# Altium PCB ControlPWMSin.PcbDoc
Units mm, origin at the board's own origin, x right, y up, seen from the top; angles counter-clockwise.
Board outline 100 x 90 mm, 2 copper layers (Top Layer, Bottom Layer); 43 components, 27 nets, 155 pads, 20 vias.
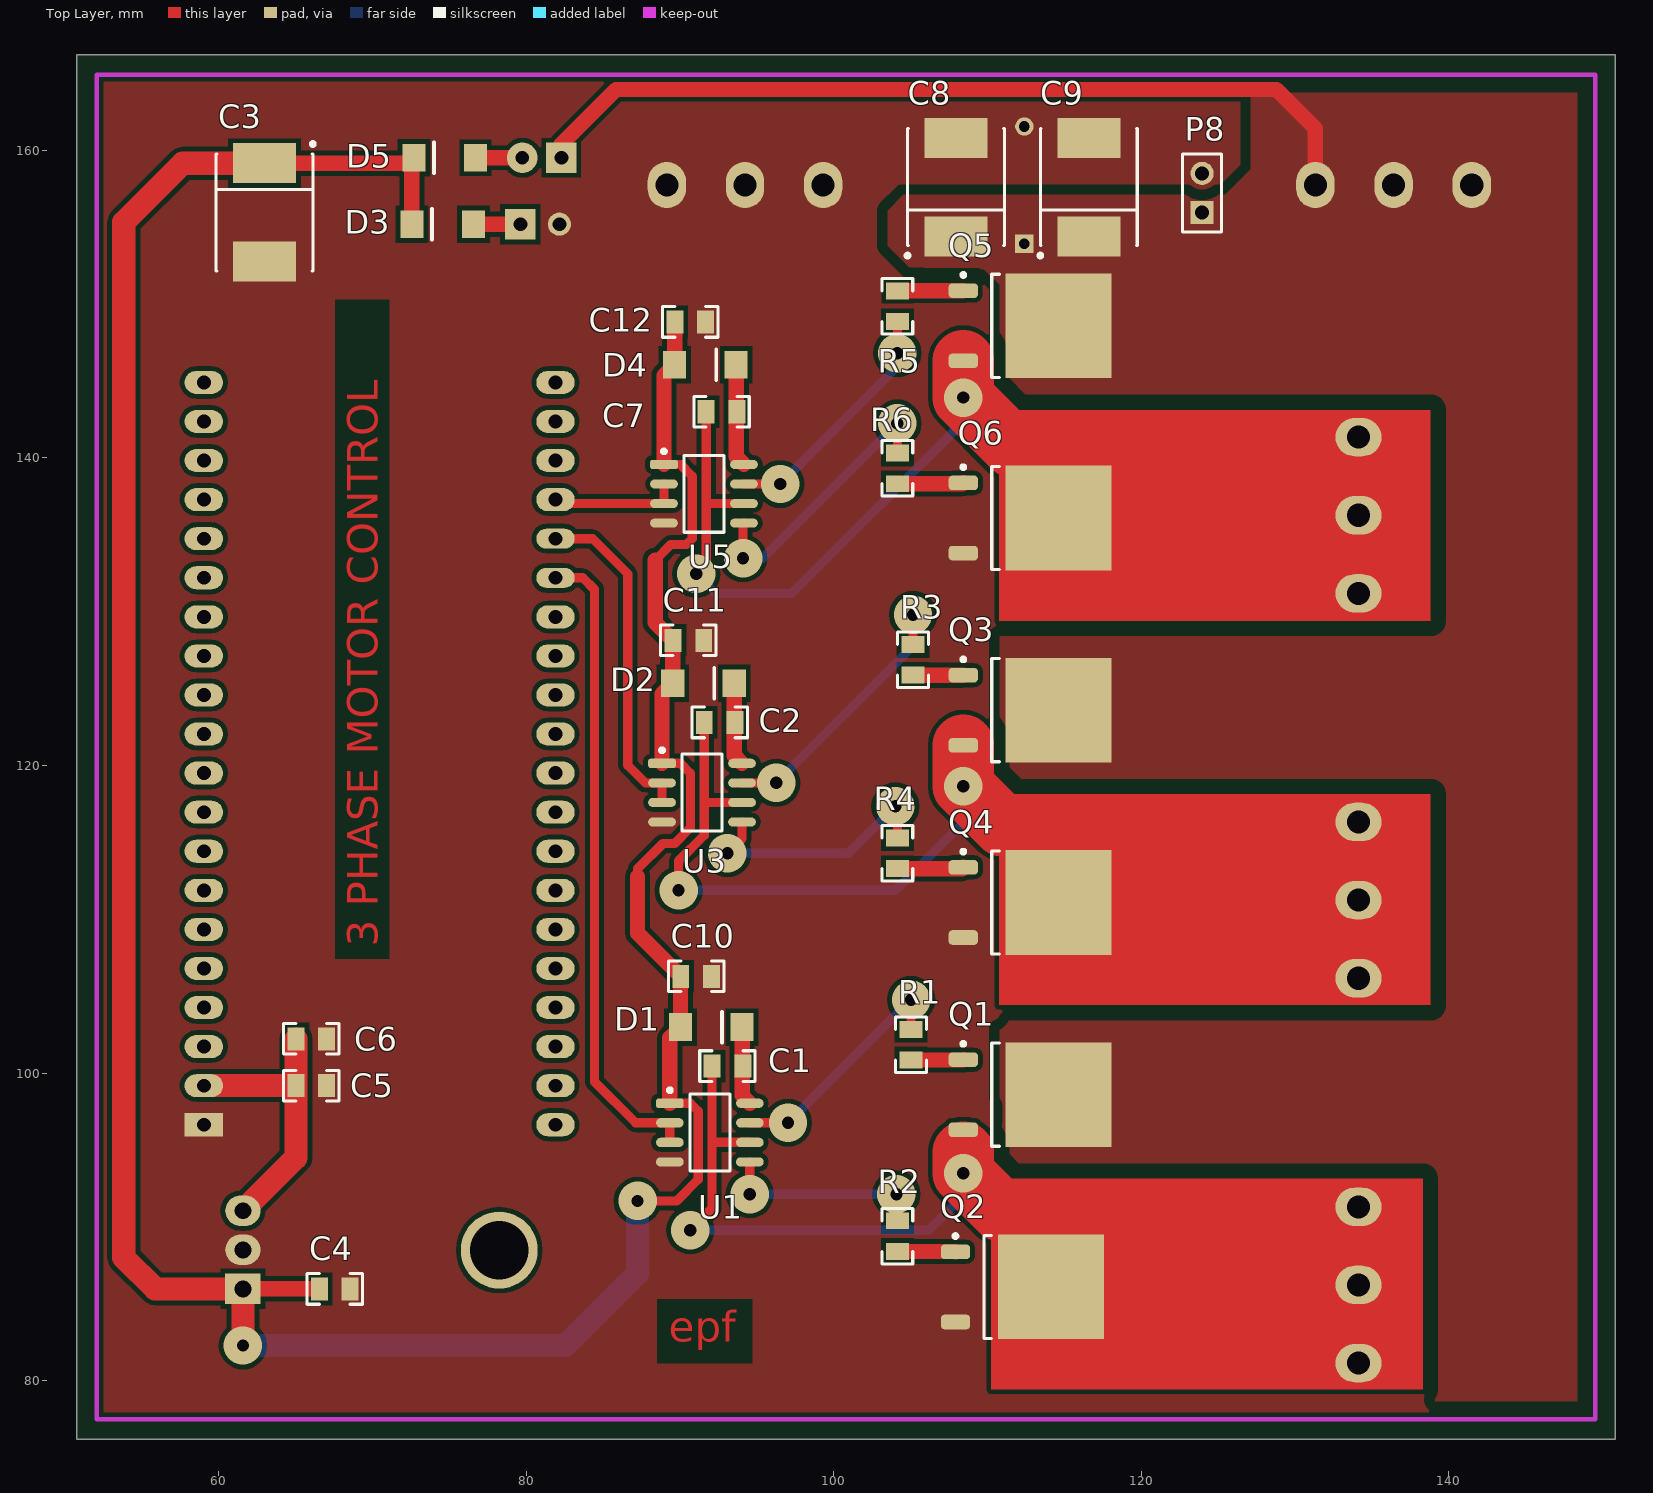
[diagram p0: Top Layer view]
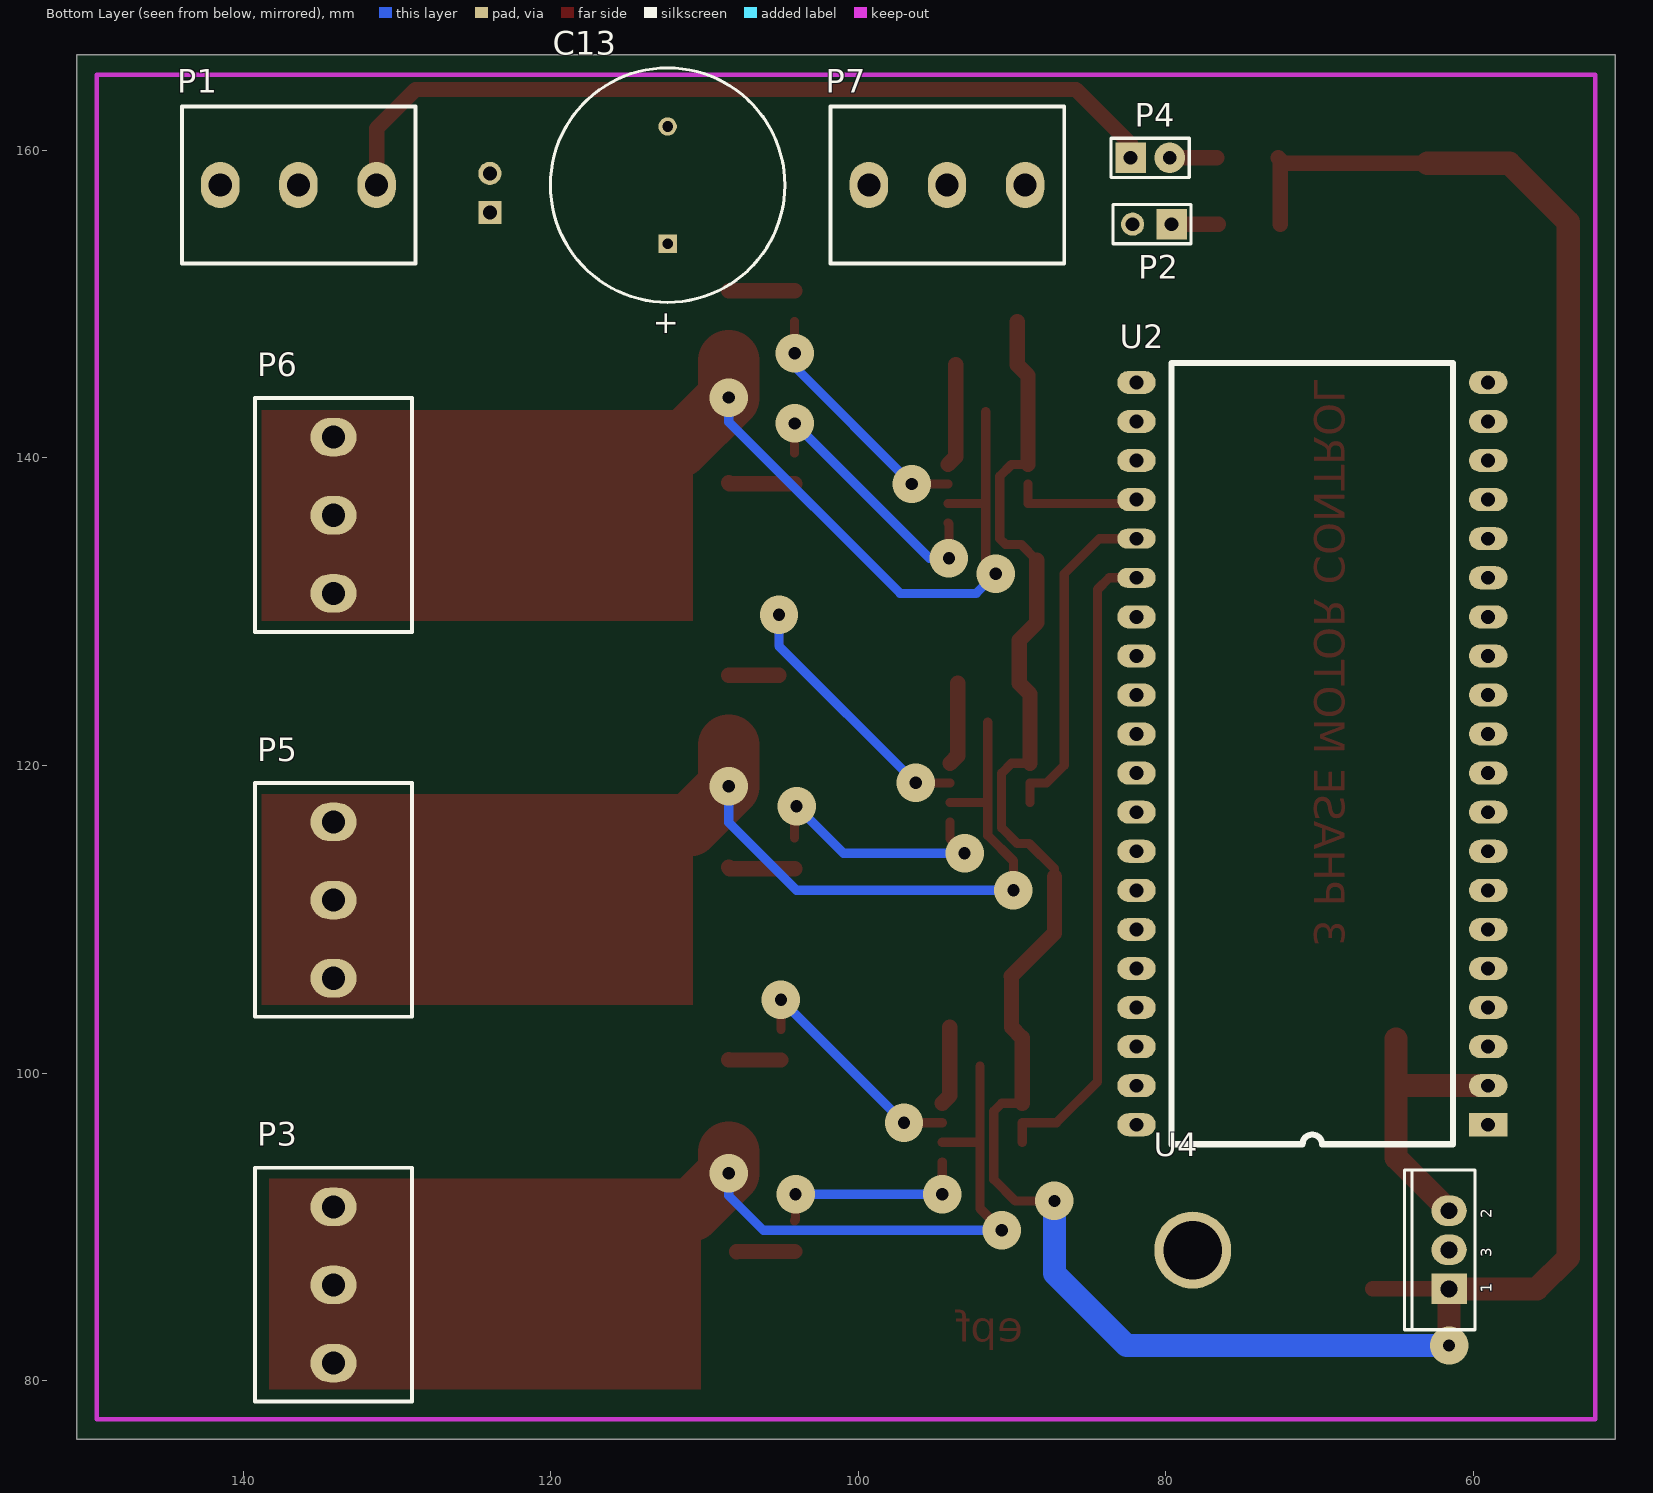
[diagram p1: Bottom Layer view, seen from below]
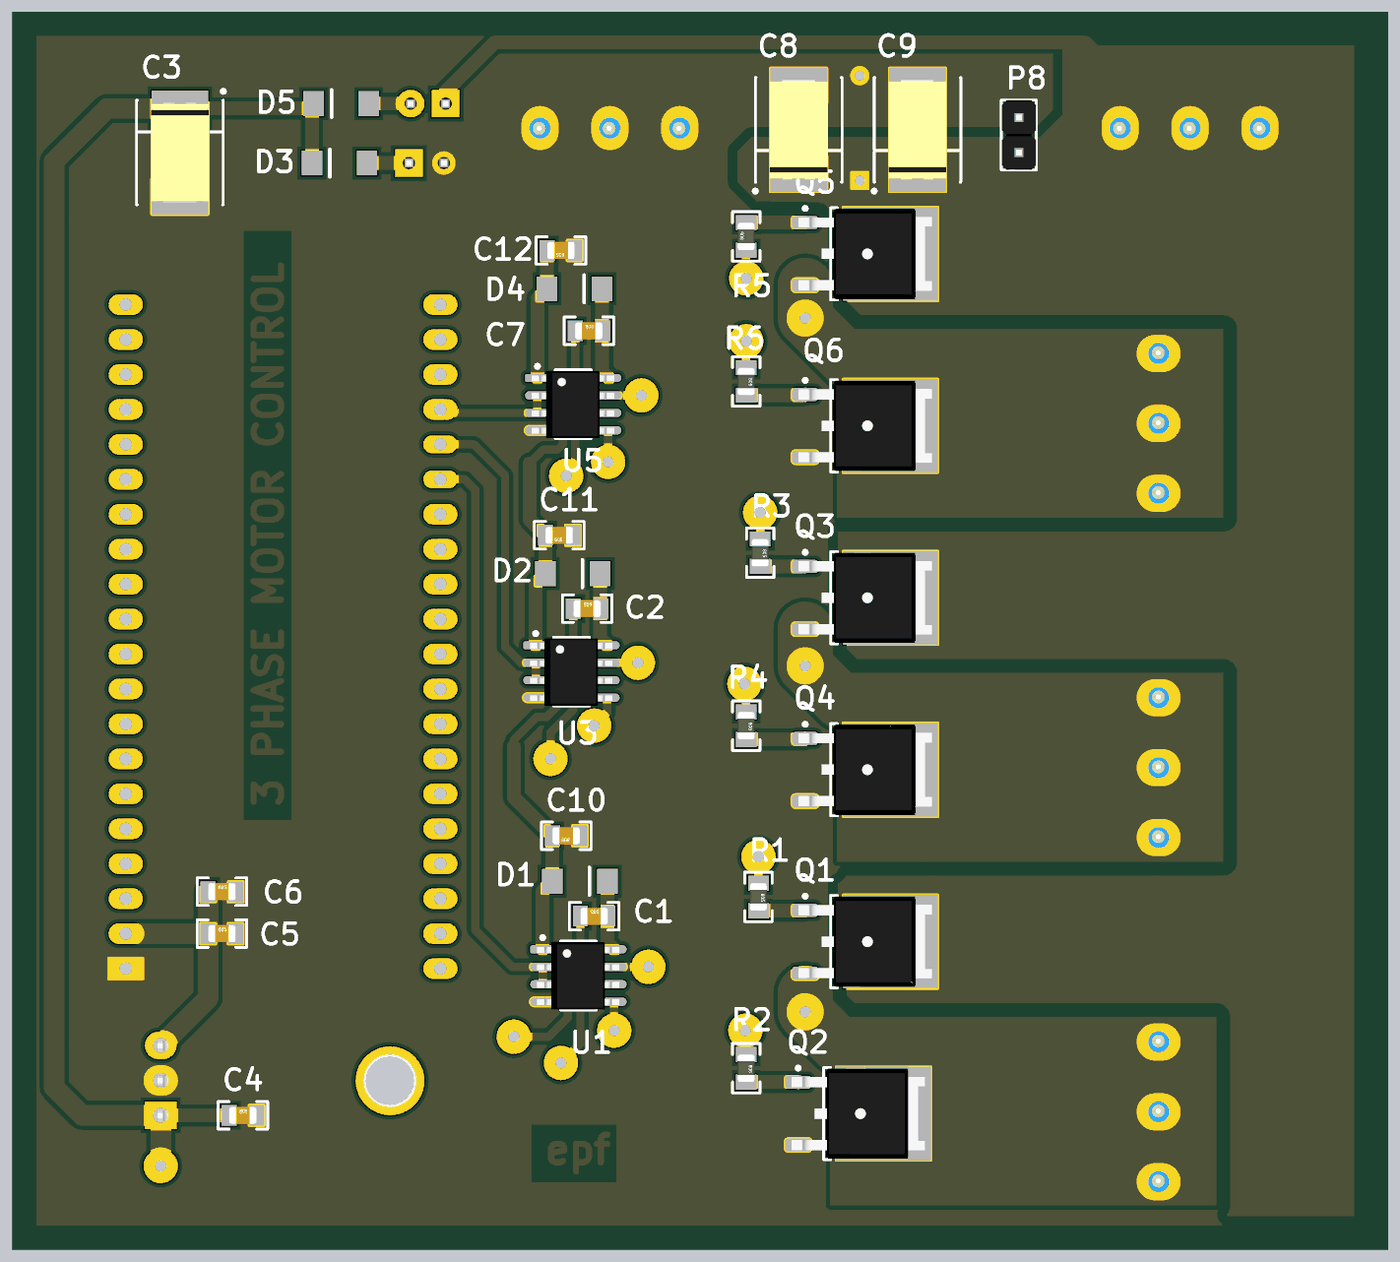
[diagram p2: 3D render of the assembled board from above, using the file's embedded part models]
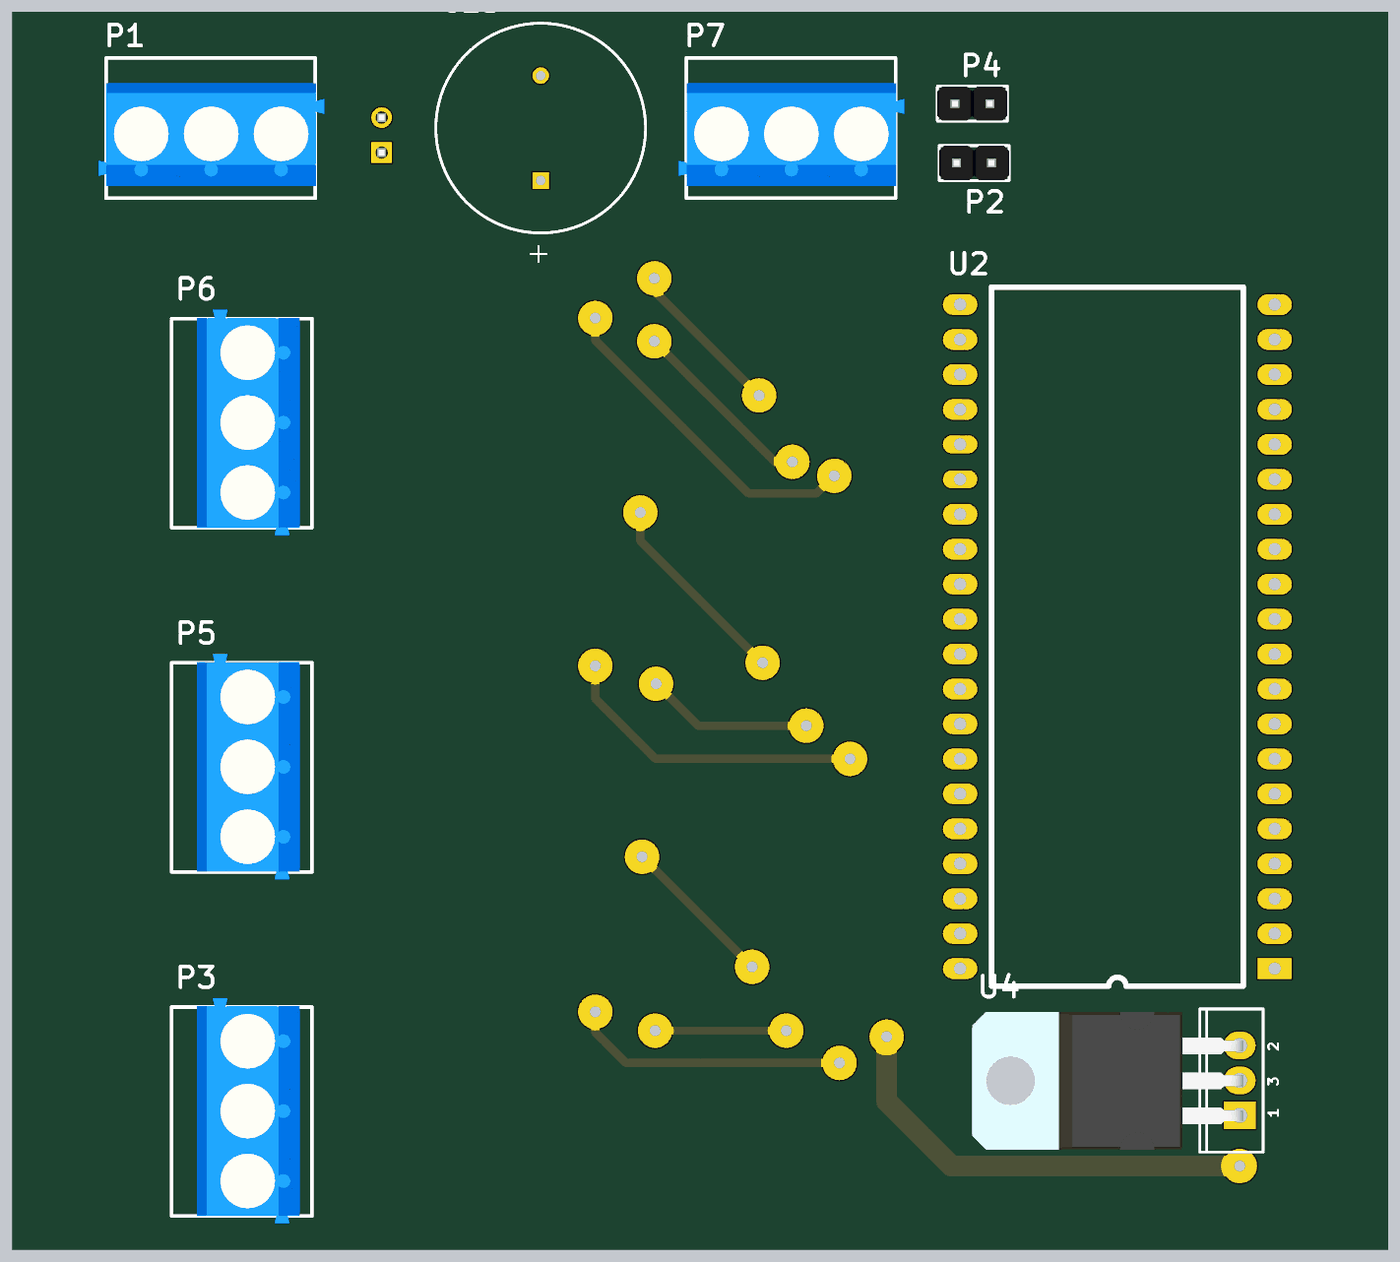
[diagram p3: 3D render of the assembled board from below, using the file's embedded part models]

## Layer stack, top to bottom
Top Layer: signal copper 0.0356
Dielectric: dielectric 0.32, FR-4, Dk 4.8
Bottom Layer: signal copper 0.0356

## Board outline
50.8,76.2 150.8,76.2 150.8,166.2 50.8,166.2

## Design rules (kind name [scope] priority, off if disabled: settings)
Clearance Clearance_2 [InNamedPolygon('TOP-gnd') vs InNamedPolygon('TOP-VIN')] p1: gap=0.7
Clearance Clearance_1 [InNamedPolygon('TOP-VIN')] p2: gap=1
Clearance [All] p3: gap=0.3
PlaneConnect [All] p1: planeconnectstyle=Direct reliefexpansion=0.508 reliefentries=4 reliefconductorwidth=0.254 reliefairgap=0.254
PolygonConnect [All] p1: connectstyle=Direct reliefconductorwidth=0.5 reliefentries=4 polygonreliefangle="90 Angle"
RoutingVias [All] p1: holewidth=0.9 width=2 viastyle="Through Hole" minholewidth=0.8 minwidth=1.27 maxholewidth=2 maxwidth=6
SilkscreenOverComponentPads [All] p1: minsilkscreentomaskgap=0.254
SolderMaskExpansion [All] p1: expansion=0.102
Width [All] p1: maxlimit=5 minlimit=0.3 preferedwidth=1
26 further rules are at their usual default settings.

## Components (designator, comment, footprint, x,y, rotation, side; value= is the part's Value field where it differs from the comment)
C1 "Capacitor" 0805_CAP 93.091,100.457 r0 top
C2 "Capacitor" 0805_CAP 92.583,122.809 r0 top
C3 "Cap Pol2" TC7360-2924 62.992,155.956 r270 top
C4 "Capacitor" 0805_CAP 67.564,85.979 r0 top
C5 "Capacitor" 0805_CAP 66.04,99.187 r0 top
C6 "Capacitor" 0805_CAP 66.04,102.235 r0 top
C7 "Capacitor" 0805_CAP 92.71,143.002 r0 top
C8 "Cap Pol2" TC7360-2924 107.95,157.607 r90 top
C9 "Cap Pol2" TC7360-2924 116.586,157.607 r90 top
C10 "Capacitor" 0805_CAP 91.059,106.299 r180 top
C11 "Capacitor" 0805_CAP 90.551,128.143 r180 top
C12 "Capacitor" 0805_CAP 90.678,148.844 r180 top
C13 "Cap Pol1" RB7.6-15 112.395,157.734 r270 bottom
D1 "1N4148" 1N4148SMD 90.043,102.997 r0 top
D2 "1N4148" 1N4148SMD 89.535,125.349 r0 top
D3 "1N4148" 1N4148SMD 76.581,155.194 r180 top
D4 "1N4148" 1N4148SMD 89.662,146.05 r0 top
D5 "1N4148" 1N4148SMD 76.708,159.512 r180 top
P1 "RegletaPCB" RegletaPCBx3 131.318,157.734 r0 bottom
P2 "Header2" Header2Macho#1 79.629,155.194 r0 bottom
P3 "RegletaPCB" RegletaPCBx3 134.112,91.313 r270 bottom
P4 "Header2" Header2Macho#2 82.296,159.512 r180 bottom
P5 "RegletaPCB" RegletaPCBx3 134.112,116.332 r270 bottom
P6 "RegletaPCB" RegletaPCBx3 134.112,141.351 r270 bottom
P7 "RegletaPCB" RegletaPCBx3 89.154,157.734 r0 bottom
P8 "Header2" Header2Macho#3 123.952,155.956 r90 top
Q1 "FDD10AN06A0" TO252-3N 112.776,98.603 r0 top
Q2 "FDD10AN06A0" TO252-3N 112.268,86.106 r0 top
Q3 "FDD10AN06A0" TO252-3N 112.776,123.596 r0 top
Q4 "FDD10AN06A0" TO252-3N 112.776,111.1 r0 top
Q5 "FDD10AN06A0" TO252-3N 112.776,148.59 r0 top
Q6 "FDD10AN06A0" TO252-3N 112.776,136.093 r0 top
R1 "Resistor" 0805_RES 105.029,101.854 r270 top
R2 "Resistor" 0805_RES 104.14,89.408 r270 top
R3 "Resistor" 0805_RES 105.156,126.873 r270 top
R4 "Resistor" 0805_RES 104.14,114.3 r270 top
R5 "Resistor" 0805_RES 104.14,149.86 r90 top
R6 "Resistor" 0805_RES 104.14,139.319 r270 top
U1 "IR2103S" SOIC127P600-8BN 91.948,96.139 r0 top
U2 "mbed" mbed 59.055,96.647 r0 bottom
U3 "IR2103S" SOIC127P600-8BN 91.44,118.237 r0 top
U4 "L78M05ABV" TO220V 61.595,88.519 r90 bottom
U5 "IR2103S" SOIC127P600-8BN 91.567,137.668 r0 top

## Footprints (in the part's own frame and the unit in brackets; to place one, negate y for a bottom-side part, rotate by r counter-clockwise, add the part's x,y. Pads: shape width x height; smd on the part's side, far side on the other; paste and mask are expansions set on the pad)
1N4148SMD [mm]
  rect 1.5x1.8 smd: 1(0,0) 2(4,0)
  silkscreen extent 2.7,-1 2.7,1
0805_CAP [mm]
  rect 1.1x1.5 smd: 1(-1,0) 2(1,0)
  silkscreen extent -1.8,-1 1.8,1, body extent -1,-0.62 1,0.63, height 0.78
0805_RES [mm]
  rect 1.1x1.5 smd: 1(-1,0) 2(1,0)
  silkscreen extent -1.8,-1 1.8,1, body extent -1,-0.62 1,0.63, height 0.78
Header2Macho#1 [mm]
  rect 2x2 hole 0.9: 1(0,0)
  round 1.5 hole 0.9: 2(2.54,0)
  silkscreen extent -1.27,-1.27 3.81,1.27, body extent -1.27,-1.25 3.81,1.25, height 8.55
Header2Macho#2 [mm]
  rect 2x2 hole 0.9: 1(0,0)
  round 2 hole 0.9: 2(2.54,0)
  silkscreen extent -1.27,-1.27 3.81,1.27, body extent -1.27,-1.25 3.81,1.25, height 8.55
Header2Macho#3 [mm]
  rect 1.5x1.5 hole 0.9: 1(0,0)
  round 1.5 hole 0.9: 2(2.54,0)
  silkscreen extent -1.27,-1.27 3.81,1.27, body extent -1.27,-1.25 3.81,1.25, height 8.55
mbed [mm]
  rect 2.5x1.5 hole 0.9: 1(0,0)
  oval 2.5x1.5 hole 0.9: 2(0,-2.54) 3(0,-5.08) 4(0,-7.62) 5(0,-10.16) 6(0,-12.7) 7(0,-15.24) 8(0,-17.78) 9(0,-20.32) 10(0,-22.86) 11(0,-25.4) 12(0,-27.94) 13(0,-30.48) 14(0,-33.02) 15(0,-35.56) 16(0,-38.1) 17(0,-40.64) 18(0,-43.18) 19(0,-45.72) 20(0,-48.26) 21(22.86,-48.26) 22(22.86,-45.72) 23(22.86,-43.18) 24(22.86,-40.64) 27(22.86,-33.02) 28(22.86,-30.48) 29(22.86,-27.94) 30(22.86,-25.4) 31(22.86,-22.86) 32(22.86,-20.32) 33(22.86,-17.78) 34(22.86,-15.24) 35(22.86,-12.7) 36(22.86,-10.16) 37(22.86,-7.62) 38(22.86,-5.08) 39(22.86,-2.54) 40(22.86,0)
  oval 2.5x1.3 hole 0.9: 25(22.86,-38.1) 26(22.86,-35.56)
  silkscreen extent 2.28,-49.53 20.58,1.27
RB7.6-15 [mm]
  rect 1.2x1.2 hole 0.7: 1(3.81,0)
  round 1.2 hole 0.7: 2(-3.81,0)
  silkscreen extent -7.62,-7.62 7.62,7.62
RegletaPCBx3 [mm]
  oval 2.5x3 hole 1.5: 1(0,0) 2(5.08,0) 3(10.16,0)
  silkscreen extent -2.54,-5.1 12.66,5.1, body extent -3.2,-3.28 13.2,4.22, height 9.95
SOIC127P600-8BN [mm] "SOIC, 8-Leads, Body 4.9x3.9mm, Pitch 1.27mm, IPC Medium Density"
  rrect50% 1.8x0.6 smd: 1(-2.6,1.905)
  oval 1.8x0.6 smd: 2(-2.6,0.635) 3(-2.6,-0.635) 4(-2.6,-1.905) 5(2.6,-1.905) 6(2.6,-0.635) 7(2.6,0.635) 8(2.6,1.905)
  silkscreen extent -2.72,-2.5 1.3,2.88, body extent -3.02,-2.48 2.97,2.42, height 1.6
TC7360-2924 [mm] "Capacitor, SM Tantalum; Body 7.3 x 6.0 mm (LxW typ)"
  rect 2.6x4.1 smd: 1(-3.2,0) 2(3.2,0)
  silkscreen extent -4.57,-3.15 3.8,3.27, body extent -3.65,-2.15 3.65,2.15, height 4.11
TO220V [mm] "TO, Thru-Hole, Vertical, Heatsink Mounted; 3 In-Line Leads; Pitch 2.54 mm; Pin sequence 1, 3, 2"
  round 5 hole 3.8: 0(-0.025,16.662)
  rect 2x2.3 hole 1.1: 1(-2.54,0)
  oval 2x2.3 hole 1.1: 2(2.54,0) 3(0,0)
  silkscreen extent -5.2,-1.7 5.2,2.9, body extent -5.03,-0.25 4.97,19.45, height 4.5
TO252-3N [mm] "D-PAK, 4-Leads, Body 6.1x6.5mm, Pitch 2.28mm, Lead Span 9.7mm, IPC Medium Density"
  rrect50% 1.9x0.95 smd: 1(-4.35,2.28) 3(-4.35,-2.28)
  rect 6.9x6.8 smd: 4(1.85,0)
  silkscreen extent -4.47,-3.35 -2,3.43, body extent -4.84,-3.29 4.86,3.29, height 2.3

## Part data
C1 C2 C4 C5 C6 C7 C10 C11 C12: library part Cap
C3 C8 C9: "Polarized Capacitor (Axial)"
C13: "Polarized Capacitor (Radial)"
P1 P3 P5 P6 P7: library part RegletaPCBx3
Q1 Q2 Q3 Q4 Q5 Q6: "N-Channel Power MOSFET"
R1 R2 R3 R4 R5 R6: library part Res
U1 U3 U5: "High and Low Side Driver"
U4: "Precision 500mA Regulator"

## Via types
v1: diameter 2.5, hole 0.8, Top Layer to Bottom Layer, 20 vias

## Nets (pads, with @x,y where several pads share a name; then routed paths per layer and width w, separated by ;. In a path a pad name is that pad's centre, name@x,y a point inside that pad or via, vN(x,y) a via of type N, cw(c..) or ccw(c..) an arc to the next point about the centre after c; other vN are vias at no path point)
5V: C5.1 C6.1 U2.2 U4.2 | length 18.6
  Top Layer w1.5: U2.2 C5.1 ; U4.2 65.04,94.504 C5.1 ; C6.1 C5.1
A: C1.1 P3.1 P3.2 P3.3 Q1.3 Q2.4 U1.6 | length 40.7
  Top Layer w0.6: v1(90.678,89.789) 92.091,91.202 92.091,95.504 ; C1.1 92.091,95.504 ; U1.6 92.091,95.504 ; 106.972,94.869 Q1.3
  Top Layer w4: 108.426,94.869 v1(108.426,93.504) 110.871,91.059
  Bottom Layer w0.6: v1(90.678,89.789) 106.172,89.789 108.426,92.043 v1(108.426,93.504)
B: C2.1 P5.1 P5.2 P5.3 Q3.3 Q4.4 U3.6 | length 43.1
  Top Layer w0.6: v1(89.916,111.887) 89.916,113.792 91.583,115.459 91.583,117.602 ; C2.1 91.583,117.602 ; U3.6 91.583,117.602
  Top Layer w4: Q3.3 v1(108.426,118.65) 110.998,116.078
  Bottom Layer w0.6: v1(89.916,111.887) 104.013,111.887 108.426,116.3 v1(108.426,118.65)
C: C7.1 P6.1 P6.2 P6.3 Q5.3 Q6.4 U5.6 | length 44.3
  Top Layer w0.6: v1(91.059,132.461) 91.71,133.112 91.71,137.16 ; C7.1 91.71,137.16 ; U5.6 91.837,137.033 91.71,137.16
  Top Layer w4: Q5.3 v1(108.426,143.923) 111.633,140.716
  Bottom Layer w0.6: v1(91.059,132.461) 92.329,131.191 97.282,131.191 108.426,142.335 v1(108.426,143.923)
GND: C3.2 C4.2 C5.2 C6.2 C8.2 C9.2 C10.1 C11.1 C12.1 C13.2 P2.2 P7.1 P7.2 P7.3 P8.2 Q2.3 Q4.3 Q6.3 U1.4 U2.1 U3.4 U4.3 U5.4
NetC1_2: C1.2 D1.2 U1.8 | length 5.2
  Top Layer w1: D1.2 94.043,98.549 U1.8
NetC2_2: C2.2 D2.2 U3.8 | length 5.4
  Top Layer w1: D2.2 93.535,120.647 U3.8
NetC7_2: C7.2 D4.2 U5.8 | length 6.7
  Top Layer w1: D4.2 93.662,140.078 U5.8
NetD5_1: D5.1 P4.2 | length 3
  Top Layer w1: D5.1 P4.2
NetQ1_1: Q1.1 R1.2 | length 3.4
  Top Layer w1: R1.2 108.397,100.854 Q1.1
NetQ2_1: Q2.1 R2.2 | length 3.8
  Top Layer w1: R2.2 107.896,88.408 Q2.1
NetQ3_1: Q3.1 R3.2 | length 3.3
  Top Layer w1: R3.2 108.423,125.873 Q3.1
NetQ4_1: Q4.1 R4.2 | length 4.3
  Top Layer w1: R4.2 108.346,113.3 Q4.1
NetQ5_1: Q5.1 R5.2 | length 4.3
  Top Layer w1: R5.2 108.416,150.86 Q5.1
NetQ6_1: Q6.1 R6.2 | length 4.3
  Top Layer w1: R6.2 108.372,138.319 Q6.1
NetR1_1: R1.1 U1.7 | length 15.7
  Top Layer w0.6: U1.7 v1(97.028,96.774) ; R1.1 v1(105.029,104.775)
  Bottom Layer w0.6: v1(97.028,96.774) v1(105.029,104.775)
NetR2_1: R2.1 U1.5 | length 13.4
  Top Layer w0.6: v1(94.548,92.135) U1.5 ; v1(104.08,92.135) 104.08,90.468 R2.1
  Bottom Layer w0.6: v1(94.548,92.135) v1(104.08,92.135)
NetR3_1: R3.1 U3.7 | length 18.8
  Top Layer w0.6: U3.7 v1(96.266,118.872) ; R3.1 v1(105.156,129.794)
  Bottom Layer w0.6: v1(96.266,118.872) 105.156,127.762 v1(105.156,129.794)
NetR4_1: R4.1 U3.5 | length 16.7
  Top Layer w0.6: v1(93.091,114.3) 94.04,115.249 U3.5 ; v1(104.013,117.348) 104.14,117.221 R4.1
  Bottom Layer w0.6: v1(93.091,114.3) 100.965,114.3 v1(104.013,117.348)
NetR5_1: R5.1 U5.7 | length 16.1
  Top Layer w0.6: U5.7 v1(96.52,138.303) ; v1(104.14,146.812) R5.1
  Bottom Layer w0.6: v1(96.52,138.303) 104.14,145.923 v1(104.14,146.812)
NetR6_1: R6.1 U5.5 | length 17.9
  Top Layer w0.6: v1(94.107,133.477) 94.107,135.703 U5.5 ; R6.1 v1(104.14,142.24)
  Bottom Layer w0.6: v1(94.107,133.477) 95.377,133.477 v1(104.14,142.24)
PWM1: U1.2 U1.3 U2.26 | length 42.1
  Top Layer w0.6: U2.26 83.693,132.207 84.455,131.445 84.455,99.441 87.122,96.774 U1.2 U1.3
PWM2: U2.25 U3.2 U3.3 | length 22.1
  Top Layer w0.6: U2.25 84.328,134.747 86.614,132.461 86.614,120.015 87.757,118.872 U3.2 U3.3
PWM3: U2.24 U5.2 U5.3 | length 8.4
  Top Layer w0.6: U2.24 82.169,137.033 U5.3 U5.2
VCC: C3.1 C4.1 C10.2 C11.2 C12.2 D1.1 D2.1 D3.2 D4.1 D5.2 U1.1 U3.1 U4.1 U5.1 | length 212.3
  Top Layer w0.6: v1(87.249,91.694) 89.789,91.694 91.191,93.096 91.191,97.531 90.678,98.044 U1.1 ; 87.249,112.776 87.249,113.284 88.9,114.935 89.662,114.935 90.683,115.956 90.683,119.502 90.043,120.142 U3.1 ; 88.392,133.35 89.408,134.366 90.424,134.366 90.81,134.752 90.81,138.806 90.043,139.573 U5.1
  Top Layer w1: U4.1 C4.1 ; C3.1 72.352,159.156 D5.2@72.581,159.385 ; D3.2 D5.2@72.581,159.385 ; D5.2 D5.2@72.581,159.385 ; 87.249,112.776 87.249,109.109 C10.2 90.043,106.283 D1.1 89.348,102.302 U1.1 ; 88.392,133.35 88.392,129.302 C11.2 89.535,128.127 D2.1 88.84,124.654 U3.1 ; U5.1 88.967,145.355 D4.1 89.662,148.828 C12.2
  Top Layer w1.5: v1(61.595,82.296) U4.1 55.88,85.979 53.848,88.011 53.848,155.321 57.683,159.156 C3.1
  Bottom Layer w1.5: v1(61.595,82.296) 82.55,82.296 87.249,86.995 v1(87.249,91.694)
VCCIN: D3.1 P2.1 | length 3
  Top Layer w1: D3.1 P2.1
VIN: C8.1 C9.1 C13.1 P1.1 P1.2 P1.3 P4.1 P8.1 Q1.4 Q3.4 Q5.4 | length 56.1
  Top Layer w1: P4.1 82.296,160.401 85.845,163.95 128.785,163.95 131.318,161.417 P1.1
pads on no net: U2.3 U2.4 U2.5 U2.6 U2.7 U2.8 U2.9 U2.10 U2.11 U2.12 U2.13 U2.14 U2.15 U2.16 U2.17 U2.18 U2.19 U2.20 U2.21 U2.22 U2.23 U2.27 U2.28 U2.29 U2.30 U2.31 U2.32 U2.33 U2.34 U2.35 U2.36 U2.37 U2.38 U2.39 U2.40 U4.0

## Polygon pours and split planes (outlines as drawn)
GND on Top Layer "TOP-gnd" (solid, remove dead copper, pour order 1001): 50.927,166.116 50.927,77.089 50.419,76.581 50.927,76.073 151.003,76.073 151.003,166.878 151.257,167.132
VIN on Top Layer "TOP-Vin" (solid, remove dead copper, pour order 1000): 150.876,166.116 127.127,166.116 127.127,158.75 125.467,157.099 119.849,157.099 104.526,157.099 103.505,156.083 103.505,154.051 103.505,153.797 104.526,152.781 105.037,152.273 109.762,152.273 110.783,151.257 110.783,151.003 110.783,93.218 111.294,92.71 137.597,92.71 137.597,76.073 137.724,75.946 137.98,76.2 150.876,76.2

## Keep-outs
Keep-Out Layer:
  lines w0.3: 52.1,77.5 52.1,164.9 149.5,164.9 149.5,77.5 52.1,77.5

## Other copper
Top Layer:
  rectangle net A: 110.236,79.426 138.303,93.142
  rectangle net B: 110.744,104.419 138.811,118.135
  rectangle net C: 110.744,129.413 138.811,143.129
  text "3 PHASE MOTOR CONTROL" at 70.358,108.204 h2 r90
  text "epf" at 89.281,82.55 h2

## Dimensions
52.1,77.5 to 52.1,164.9 on Mechanical 1
52.1,77.5 to 149.5,77.5 on Mechanical 1

## Text inside footprints (layer, text, board x,y; h text height)
C13: Bottom Overlay "+" at 113.132,149.602 h1.5 r90
U4: Bottom Overlay "3" at 58.809,88.019 h0.7 r270; Bottom Overlay "2" at 58.809,90.559 h0.7 r270; Bottom Overlay "1" at 58.809,85.729 h0.7 r270